# Altium PCB Aux_Lights_Daughter_REV2.PcbDoc
Units mil, origin at the board's own origin, x right, y up, seen from the top; angles counter-clockwise.
Board outline 2365 x 1945 mil, 2 copper layers (Top Layer, Bottom Layer); 21 components, 24 nets, 152 pads, 2 vias.
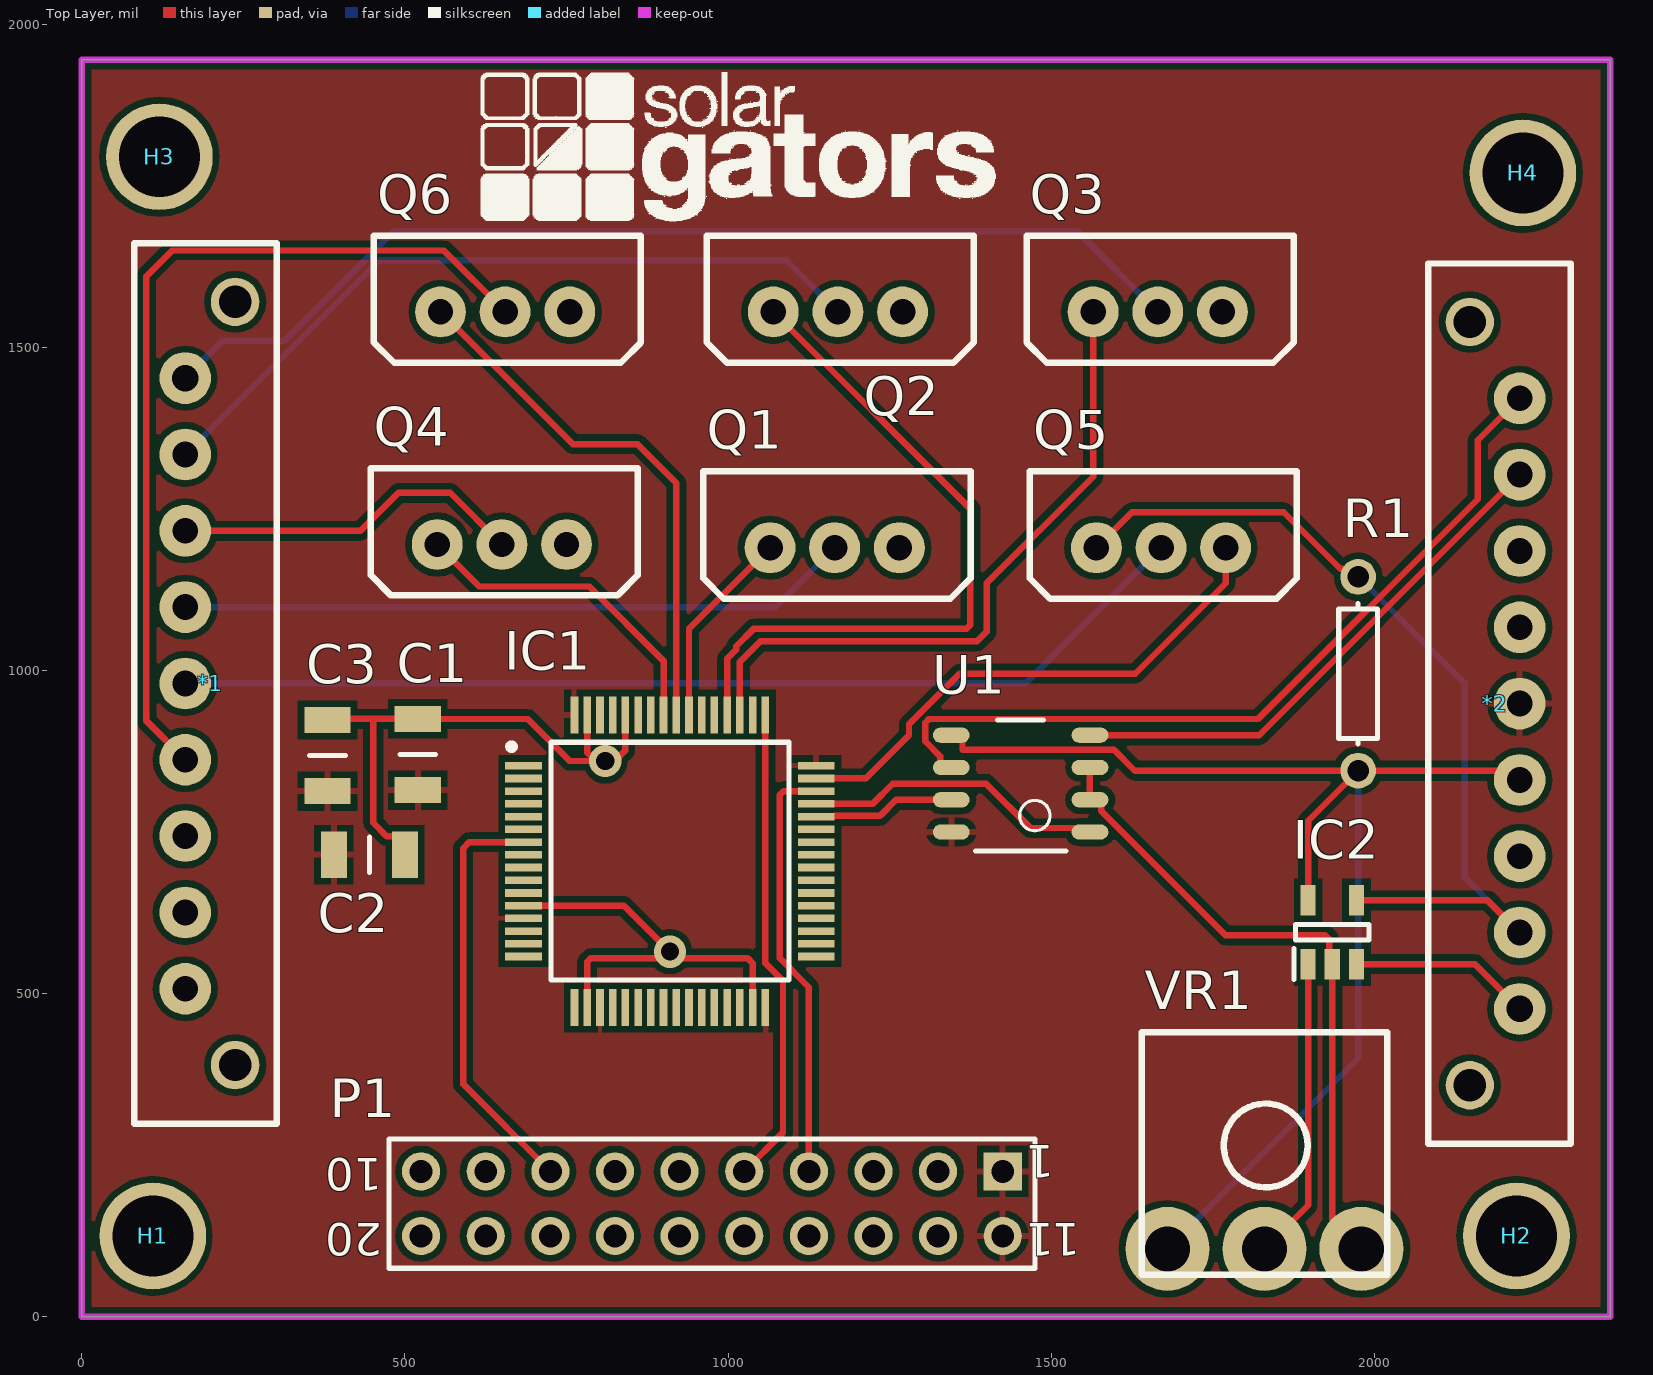
[diagram p0: Top Layer view]
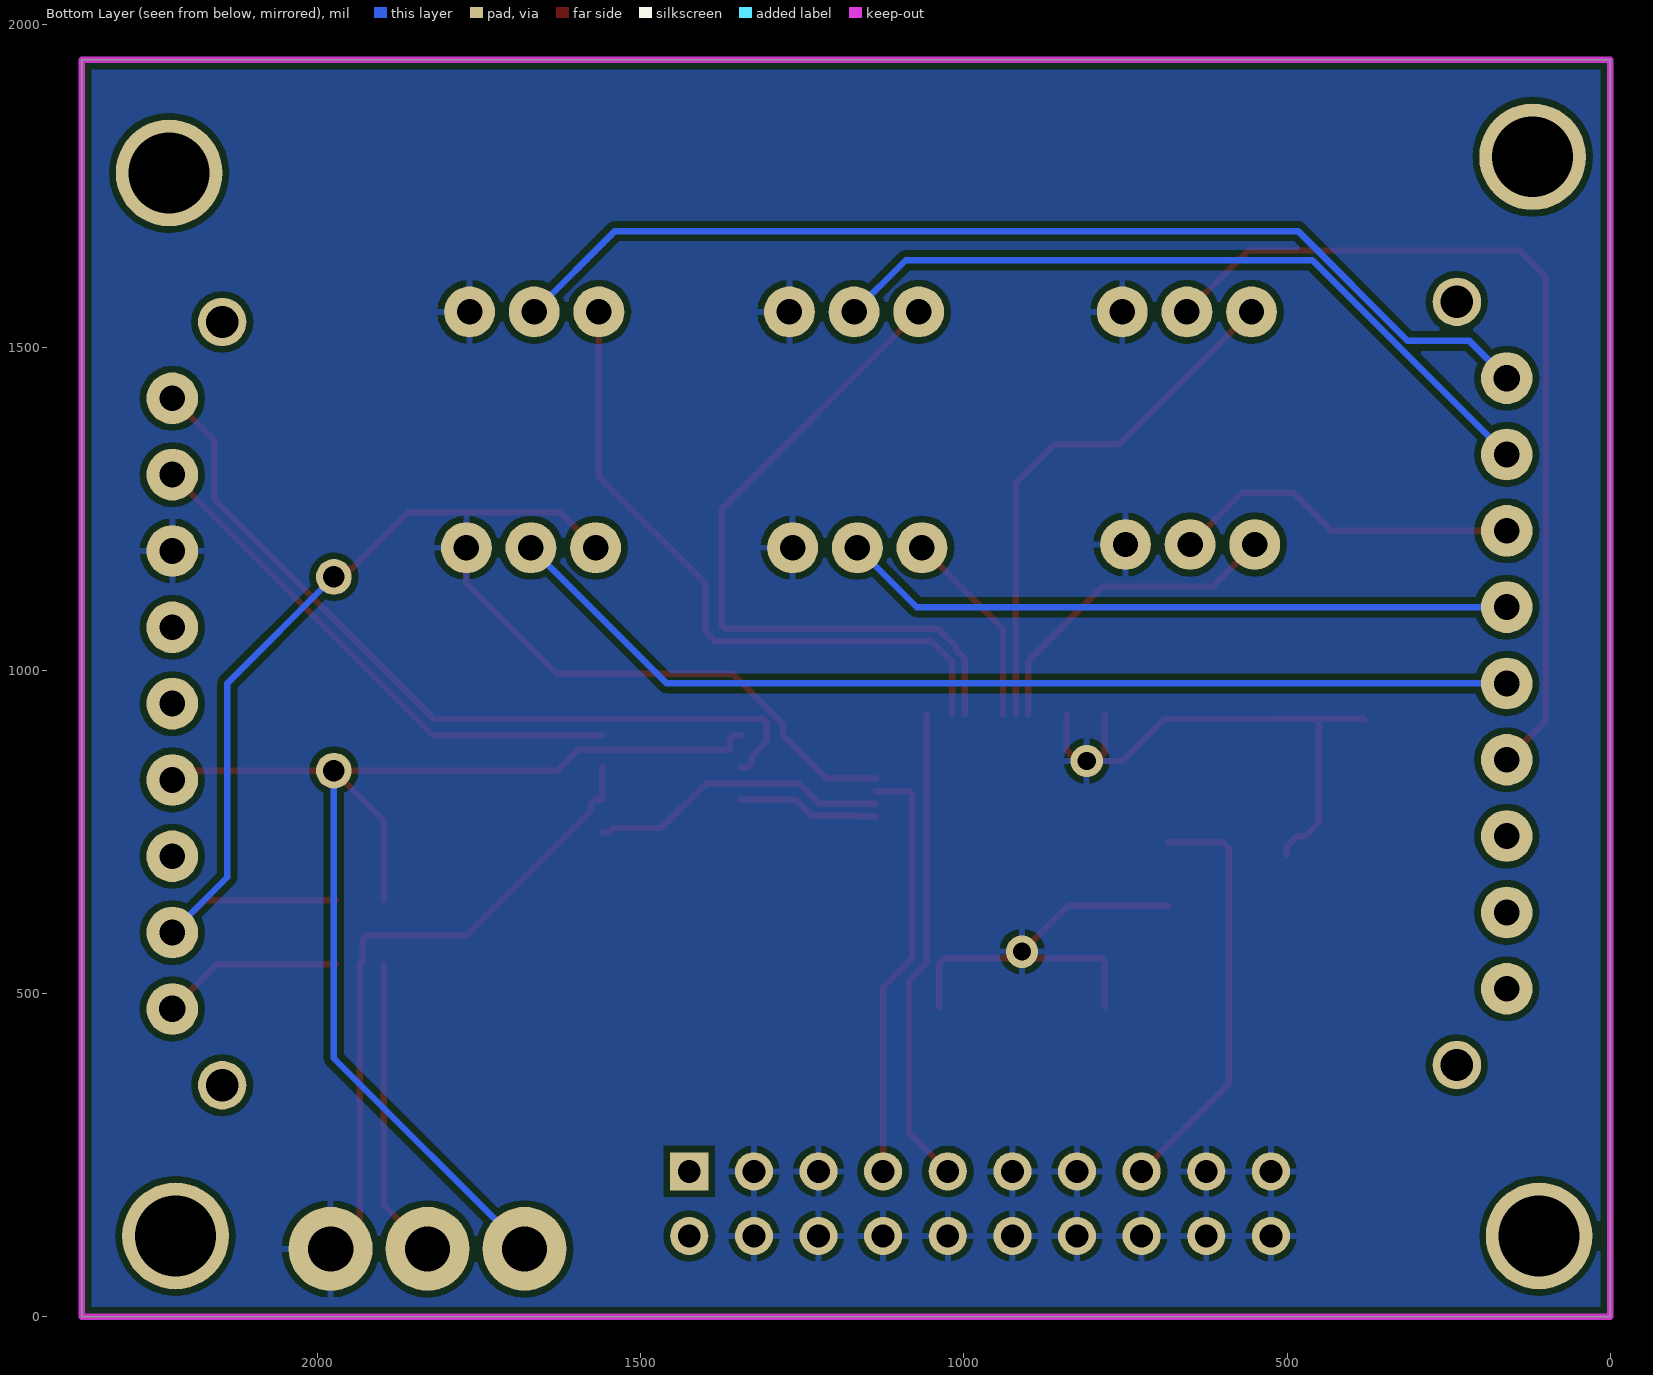
[diagram p1: Bottom Layer view, seen from below]

## Layer stack, top to bottom
Top Solder: solder mask 0.4, Solder Resist, Dk 3.5
Top Layer: signal copper 1.4
Dielectric 1: dielectric 12.6, FR-4, Dk 4.8
Bottom Layer: signal copper 1.4
Bottom Solder: solder mask 0.4, Solder Resist, Dk 3.5

## Board outline
0,0 2365,0 2365,1945 0,1945

## Design rules (kind name [scope] priority, off if disabled: settings)
Clearance Clearance_2 [InNamedPolygon('Top Layer-3V3')] p1: gap=10 ignorepadtopadclearanceinfootprint=FALSE except(0: Arc-Hole Track-Hole SMDPad-Hole THPad-Hole Via-Hole Fill-Hole Poly-Hole Region-Hole Text-Hole; 6: Fill-Fill Fill-Poly Fill-Region Poly-Poly Poly-Region Region-Region)
Clearance Clearance_1 [InNamedPolygon('Bottom Layer-GND')] p2: gap=10 ignorepadtopadclearanceinfootprint=FALSE except(0: Arc-Hole Track-Hole SMDPad-Hole THPad-Hole Via-Hole Fill-Hole Poly-Hole Region-Hole Text-Hole; 6: Fill-Fill Fill-Poly Fill-Region Poly-Poly Poly-Region Region-Region)
Clearance [All] p3: gap=10 ignorepadtopadclearanceinfootprint=FALSE except(0: Arc-Hole Track-Hole SMDPad-Hole THPad-Hole Via-Hole Fill-Hole Poly-Hole Region-Hole Text-Hole; 5: SMDPad-SMDPad; 6: Arc-Arc Arc-Track Arc-SMDPad Arc-THPad Arc-Fill Arc-Poly Arc-Region Track-Track Track-SMDPad Track-THPad Track-Fill Track-Poly Track-Region; 7: Fill-Fill Fill-Poly Fill-Region Poly-Poly Poly-Region Region-Region)
PolygonConnect [All] p1: connectstyle=Relief reliefconductorwidth=10 reliefentries=4 polygonreliefangle="90 Angle" airgapwidth=10
RoutingVias [All] p1: holewidth=28 width=50 viastyle="Through Hole" minholewidth=28 minwidth=50 maxholewidth=28 maxwidth=50
SolderMaskExpansion [All] p1: expansion=4
Width [All] p1: maxlimit=10 minlimit=10 preferedwidth=10
30 further rules are at their usual default settings.

## Components (designator, comment, footprint, x,y, rotation, side; value= is the part's Value field where it differs from the comment)
*1 "9-Pin Connector" 9-Pin 301.73,298.9 r90 top
*2 "9-Pin Connector" 9-Pin 2083.27,1629.88 r270 top
C1 "C1206C104K5RAC7867" CAPC3216X110N 520,870 r90 top
C2 "C1206C104K5RAC7867" CAPC3216X110N 445,715 r0 top
C3 "C1206C104K5RAC7867" CAPC3216X110N 380,868.39 r90 top
H1 "Hole 125mil" "Hole 125mil" 110,125 r90 top
H2 "Hole 125mil" "Hole 125mil" 2220,125 r90 top
H3 "Hole 125mil" "Hole 125mil" 120,1795 r90 top
H4 "Hole 125mil" "Hole 125mil" 2230,1770 r90 top
IC1 "STM32F072RBT6" QFP50P1200X1200X160-64N 910,705 r0 top
IC2 "LM397MF_NOPB" SOT95P280X145-5N 1935,595 r90 top
P1 "Programmer Header" HDR2X10_CEN 1425,225 r180 top
Q1 "13N06L" 13N06L 1265,1190 r180 top
Q2 "13N06L" 13N06L 1270,1555 r180 top
Q3 "13N06L" 13N06L 1765,1555 r180 top
Q4 "13N06L" 13N06L 750,1195 r180 top
Q5 "13N06L" 13N06L 1770,1190 r180 top
Q6 "13N06L" 13N06L 755,1555 r180 top
R1 "Res1" AXIAL-0.3 1975,995 r90 top value=100k
U1 "TCAN1042HV" CANIC 1242.72,855 r180 top
VR1 "P160KN-0QC17B10K" "POT inline wide" 1730,105 r0 top

## Footprints (in the part's own frame and the unit in brackets; to place one, negate y for a bottom-side part, rotate by r counter-clockwise, add the part's x,y. Pads: shape width x height; smd on the part's side, far side on the other; paste and mask are expansions set on the pad)
9-Pin [mil]
  round 80 hole 41: 1(1153.54,141.73)
  round 80 hole 40: 2(1035.43,141.73) 3(917.32,141.73) 4(799.21,141.73) 5(681.1,141.73) 6(562.99,141.73) 7(444.88,141.73) 8(326.77,141.73) 9(208.66,141.73)
  round 75 hole 50: 10(90.55,64.57) 11(1271.65,64.57)
  silkscreen extent 0,0 1362,220
13N06L [mm]
  round 2 hole 1: D(2.54,0) G(5.08,0) S(0,0)
  silkscreen extent -2.8,-3 7.7,2
AXIAL-0.3 [mm] "Axial Device, Thru-Hole; 2 Leads; 0.3 in Pin Spacing"
  round 1.4 hole 0.85: 1(-3.81,0) 2(3.81,0)
  silkscreen extent -2.77,-0.76 2.77,0.76
CANIC [mm]
  oval 1.45x0.6 smd paste+0 mask+0.051: 1(-8.059,2.667) 2(-8.059,1.397) 3(-8.059,0.127) 4(-8.059,-1.143) 5(-2.609,-1.143) 6(-2.609,0.127) 7(-2.609,1.397) 8(-2.609,2.667)
  silkscreen extent -7.11,-1.74 -3.56,3.4, body extent -7.29,-1.68 -3.38,3.53, height 1.75
CAPC3216X110N [mm]
  rect 1.02x1.82 smd: 1(-1.4,0) 2(1.4,0)
  silkscreen extent 0,-0.7 0,0.7, body extent -1.6,-0.8 1.6,0.8, height 1.1
HDR2X10_CEN [mm] "Connector; Header; 10x2 Position"
  rect 1.5x1.5 hole 0.9: 1(0,0)
  round 1.5 hole 0.9: 2(2.54,0) 3(5.08,0) 4(7.62,0) 5(10.16,0) 6(12.7,0) 7(15.24,0) 8(17.78,0) 9(20.32,0) 10(22.86,0) 11(0,2.54) 12(2.54,2.54) 13(5.08,2.54) 14(7.62,2.54) 15(10.16,2.54) 16(12.7,2.54) 17(15.24,2.54) 18(17.78,2.54) 19(20.32,2.54) 20(22.86,2.54)
  silkscreen extent -1.27,-1.27 24.13,3.81
"Hole 125mil" [mil]
  round 165 hole 125: 1(0,0)
"POT inline wide" [mil]
  round 130 hole 70: 1(-50,0) 2(100,0) 3(250,0)
  silkscreen extent -90,-40 290,335
QFP50P1200X1200X160-64N [mm]
  rect 1.45x0.3 smd: 1(-5.75,3.75) 2(-5.75,3.25) 3(-5.75,2.75) 4(-5.75,2.25) 5(-5.75,1.75) 6(-5.75,1.25) 7(-5.75,0.75) 8(-5.75,0.25) 9(-5.75,-0.25) 10(-5.75,-0.75) 11(-5.75,-1.25) 12(-5.75,-1.75) 13(-5.75,-2.25) 14(-5.75,-2.75) 15(-5.75,-3.25) 16(-5.75,-3.75) 33(5.75,-3.75) 34(5.75,-3.25) 35(5.75,-2.75) 36(5.75,-2.25) 37(5.75,-1.75) 38(5.75,-1.25) 39(5.75,-0.75) 40(5.75,-0.25) 41(5.75,0.25) 42(5.75,0.75) 43(5.75,1.25) 44(5.75,1.75) 45(5.75,2.25) 46(5.75,2.75) 47(5.75,3.25) 48(5.75,3.75)
  rect 0.3x1.45 smd: 17(-3.75,-5.75) 18(-3.25,-5.75) 19(-2.75,-5.75) 20(-2.25,-5.75) 21(-1.75,-5.75) 22(-1.25,-5.75) 23(-0.75,-5.75) 24(-0.25,-5.75) 25(0.25,-5.75) 26(0.75,-5.75) 27(1.25,-5.75) 28(1.75,-5.75) 29(2.25,-5.75) 30(2.75,-5.75) 31(3.25,-5.75) 32(3.75,-5.75) 49(3.75,5.75) 50(3.25,5.75) 51(2.75,5.75) 52(2.25,5.75) 53(1.75,5.75) 54(1.25,5.75) 55(0.75,5.75) 56(0.25,5.75) 57(-0.25,5.75) 58(-0.75,5.75) 59(-1.25,5.75) 60(-1.75,5.75) 61(-2.25,5.75) 62(-2.75,5.75) 63(-3.25,5.75) 64(-3.75,5.75)
  silkscreen extent -6.35,-4.68 4.68,4.68, body extent -6,-6 6,6, height 1.6
SOT95P280X145-5N [mm]
  rect 1.2x0.6 smd: 1(-1.25,0.95) 2(-1.25,0) 3(-1.25,-0.95) 4(1.25,-0.95) 5(1.25,0.95)
  silkscreen extent -1.85,-1.45 0.3,1.5, body extent -1.4,-1.45 1.4,1.45, height 1.45

## Part data
C1 C2 C3: "Capacitor", Manufacturer_Name=Kemet, Mouser2 Part Number=80-C1206104K5RAC7867, Datasheet Link=https://componentsearchengine.com/Datasheets/1/C1206C104K5RAC7867.pdf, Height=1.1mm, Manufacturer_Part_Number=C1206C104K5RAC7867, Mouser2 Price/Stock=https://www.mouser.com/Search/Refine.aspx?Keyword=80-C1206104K5RAC7867
IC1: "Integrated Circuit", Manufacturer_Name=STMicroelectronics, Mouser Part Number=511-STM32F072RBT6, Datasheet Link=https://componentsearchengine.com/Datasheets/1/STM32F072RBT6.pdf, Height=1.6mm, Manufacturer_Part_Number=STM32F072RBT6, Mouser Price/Stock=https://www.mouser.com/Search/Refine.aspx?Keyword=511-STM32F072RBT6
IC2: "Integrated Circuit", Manufacturer_Name="Texas Instruments", Manufacturer_Part_Number=LM397MF/NOPB, Mouser Part Number=926-LM397MF/NOPB, Datasheet Link=http://www.ti.com/lit/ds/symlink/lm397.pdf, Height=1.45mm, Mouser Price/Stock=https://www.mouser.com/Search/Refine.aspx?Keyword=926-LM397MF%2FNOPB
P1: library part "Header 10X2A", "Header, 10-Pin, Dual row", LatestRevisionDate=17-Jul-2002, LatestRevisionNote="Re-released for DXP Platform.", Publisher="Altium Limited"
R1: "Resistor", LatestRevisionDate=17-Jul-2002, LatestRevisionNote="Re-released for DXP Platform.", PackageDescription="Axial Device, Thru-Hole; 2 Leads; 0.3 in Pin Spacing", PackageReference=AXIAL-0.3, Published=8-Jun-2000, Publisher="Altium Limited"
U1: "TCAN1042Fault ProtectedCAN Transceiverwith CAN FD", ComponentLink1Description=Datasheet, ComponentLink1URL=http://www.ti.com/lit/ds/symlink/tcan1042hgv.pdf
VR1: "Variable Resistor", Manufacturer_Name="BI Technologies", Mouser Part Number=858-P160KN-OQC17B10K, Datasheet Link=https://componentsearchengine.com/Datasheets/1/P160KN-0QC17B10K.pdf, Height=16.5mm, Manufacturer_Part_Number=P160KN-0QC17B10K, Mouser Price/Stock=https://www.mouser.com/Search/Refine.aspx?Keyword=858-P160KN-OQC17B10K

## Via types
v1: diameter 50, hole 28, Top Layer to Bottom Layer, 2 vias

## Nets (pads, with @x,y where several pads share a name; then routed paths per layer and width w, separated by ;. In a path a pad name is that pad's centre, name@x,y a point inside that pad or via, vN(x,y) a via of type N, cw(c..) or ccw(c..) an arc to the next point about the centre after c; other vN are vias at no path point)
3V3: *2.5 C1.1 C2.1 C3.1 IC1.13 IC1.19 IC1.32 IC1.48 IC1.64 P1.1 P1.11 U1.8
5V: *2.4 IC2.5 R1.1 U1.5 VR1.1 | length 2013
  Top Layer w10: U1.5 1356.47,900 1362.76,893.71 1362.76,877.19 1597.15,877.19 1629.34,845 R1.1 ; IC2.5 1897.6,767.6 R1.1 ; *2.4 2206.06,830.67 2191.73,845 R1.1
  Bottom Layer w10: VR1.1 1975,400 R1.1
Brake-: *1.5 Q5.D | length 1597
  Bottom Layer w10: *1.5 1460,980 Q5.D
Brake_In: *2.1 IC2.3 | length 281.4
  Top Layer w10: IC2.3 2155.55,545.79 *2.1
Brake_Out: *2.2 IC2.4 Q5.G R1.2 | length 1396.5
  Top Layer w10: Q5.G 1625,1245 1860,1245 1947.41,1157.59 1950.2,1157.59 1962.79,1145 R1.2 ; IC2.4 2175.24,644.21 *2.2
  Bottom Layer w10: R1.2 2140,980 2140,680 2225,595 *2.2
CANH: *2.8 U1.4 | length 832
  Top Layer w10: U1.4 1821.89,900 *2.8
CANL: *2.9 U1.6 | length 1273.8
  Top Layer w10: U1.6 1334.4,850 1328.11,856.29 1328.11,867.32 1305,890.43 1305,919.14 1310.86,925 1820,925 2160,1265 2160,1356.22 *2.9
GND: *2.7 C1.2 C2.2 C3.2 IC1.12 IC1.18 IC1.31 IC1.47 IC1.60 IC1.63 IC2.2 P1.2 P1.3 P1.6 P1.7 P1.9 P1.10 P1.12 P1.13 P1.14 P1.15 P1.16 P1.17 P1.18 P1.19 P1.20 Q1.S Q2.S Q3.S Q4.S Q5.S Q6.S U1.2 U1.3 VR1.3 | length 3346.6
  Top Layer w10: C3.2 381.61,925.12 450.81,925.12 ; C2.2 500.12,728.48 485.04,743.56 471.56,743.56 450.81,764.31 450.81,925.12 ; IC1.12 838.9,636.1 v1(910,565) ; IC1.18 782.05,549.14 787.91,555 1030,555 1037.95,547.05 IC1.31 ; IC1.63 782.05,872.95 v1@795,860 ; v1(810,860) v1@795,860 ; v1@825,860 841.1,876.1 IC1.60 ; IC1.47 1212.95,832.95 1280,900 1280,916.77 1358.23,995 1630,995 1770,1135 Q5.S ; U1.3 U1.2 1571.03,800 1577.32,793.71 1577.32,782.68 1770,590 1924.14,590 1930,584.14 1930,550.79 IC2.2 1935,150 VR1.3 ; 450.81,925.12 C1.2 520.12,925 690,925 755,860 v1@795,860
Headlights-: *1.3 Q4.D | length 547.5
  Top Layer w10: *1.3 431.22,1216.22 490,1275 570,1275 Q4.D
Headlights_out: IC1.57 Q4.G | length 508.2
  Top Layer w10: Q4.G 615,1130 785,1130 900.16,1014.84 IC1.57
Horn-: *1.6 Q6.D | length 1383.9
  Top Layer w10: *1.6 100,921.89 100,1610 140,1650 560,1650 Q6.D
Horn_Out: IC1.56 Q6.G | length 833.3
  Top Layer w10: Q6.G 760,1350 860,1350 919.84,1290.16 IC1.56
LT-: *1.1 Q3.D | length 1651
  Bottom Layer w10: *1.1 217.56,1510 313.04,1510 483.04,1680 1540,1680 Q3.D
LT_out: IC1.51 Q3.G | length 1046.3
  Top Layer w10: IC1.51 1018.27,1013.27 1050,1045 1385,1045 1400,1060 1400,1135 1565,1300 Q3.G
NetIC2_1: IC2.1 VR1.2 | length 468.8
  Top Layer w10: VR1.2 1897.6,172.6 IC2.1
NRST_pgm15: IC1.7 P1.8 | length 653.5
  Top Layer w10: IC1.7 599.53,734.53 590,725 590,360 P1.8
Reverse-: *1.4 Q1.D | length 1043.1
  Bottom Layer w10: *1.4 1073.11,1098.11 Q1.D
Reverse_out: IC1.55 Q1.G | length 310.6
  Top Layer w10: IC1.55 939.53,1064.53 Q1.G
RT-: *1.2 Q2.D | length 1167.7
  Bottom Layer w10: *1.2 460.67,1635 1090,1635 Q2.D
RT_out: IC1.52 Q2.G | length 1098.7
  Top Layer w10: IC1.52 998.58,1018.58 1012.5,1032.5 1012.5,1037.5 1040,1065 1369.14,1065 1375,1070.86 1375,1250 Q2.G
Rx: IC1.44 U1.7 | length 219.9
  Top Layer w10: IC1.44 1137.28,774.8 1164.66,774.8 1164.86,775 1235,775 1260,800 U1.7
SWCLK_pgm9: IC1.49 P1.5 | length 742.6
  Top Layer w10: P1.5 1085,285 1085,520 1057.64,547.36 IC1.49
SWDIO_pgm7: IC1.46 P1.4 | length 659.9
  Top Layer w10: P1.4 1125,510 1080,555 1080,807.41 1085.86,813.27 IC1.46
Tx: IC1.45 U1.1 | length 467.7
  Top Layer w10: IC1.45 1223.58,793.58 1255,825 1399.22,825 1467.93,756.29 1542.68,756.29 1548.97,750 U1.1
pads on no net: *1.7 *1.8 *1.9 *1.10 *1.11 *2.3 *2.6 *2.10 *2.11 H1.1 H2.1 H3.1 H4.1 IC1.1 IC1.2 IC1.3 IC1.4 IC1.5 IC1.6 IC1.8 IC1.9 IC1.10 IC1.11 IC1.14 IC1.15 IC1.16 IC1.17 IC1.20 IC1.21 IC1.22 IC1.23 IC1.24 IC1.25 IC1.26 IC1.27 IC1.28 IC1.29 IC1.30 IC1.33 IC1.34 IC1.35 IC1.36 IC1.37 IC1.38 IC1.39 IC1.40 IC1.41 IC1.42 IC1.43 IC1.50 IC1.53 IC1.54 IC1.58 IC1.59 IC1.61 IC1.62

## Polygon pours and split planes (outlines as drawn)
GND on Bottom Layer "Bottom Layer-GND" (solid, pour order 2): 0,0 0,1945 2365,1945 2365,0
3V3 on Top Layer "Top Layer-3V3" (solid, pour order 0): 0,0 0,1945 2365,1945 2365,0

## Keep-outs
Keep-Out Layer:
  the board outline again, w10

## Silkscreen, mask and mechanical layers (free items; w line width, h text height)
Top Overlay:
  drawing of 2657 lines, arcs and shapes, not listed

## Text inside footprints (layer, text, board x,y; h text height)
P1: Top Overlay "20" at 465,145 h50 r180; Top Overlay "10" at 465,245 h50 r180; Top Overlay "1" at 1505,145 h50 r180; Top Overlay "1" at 1545,145 h50 r180; Top Overlay "1" at 1505,265 h50 r180